# EAGLE board joint_1 (EAGLE 9.6.2), part 1 of 2
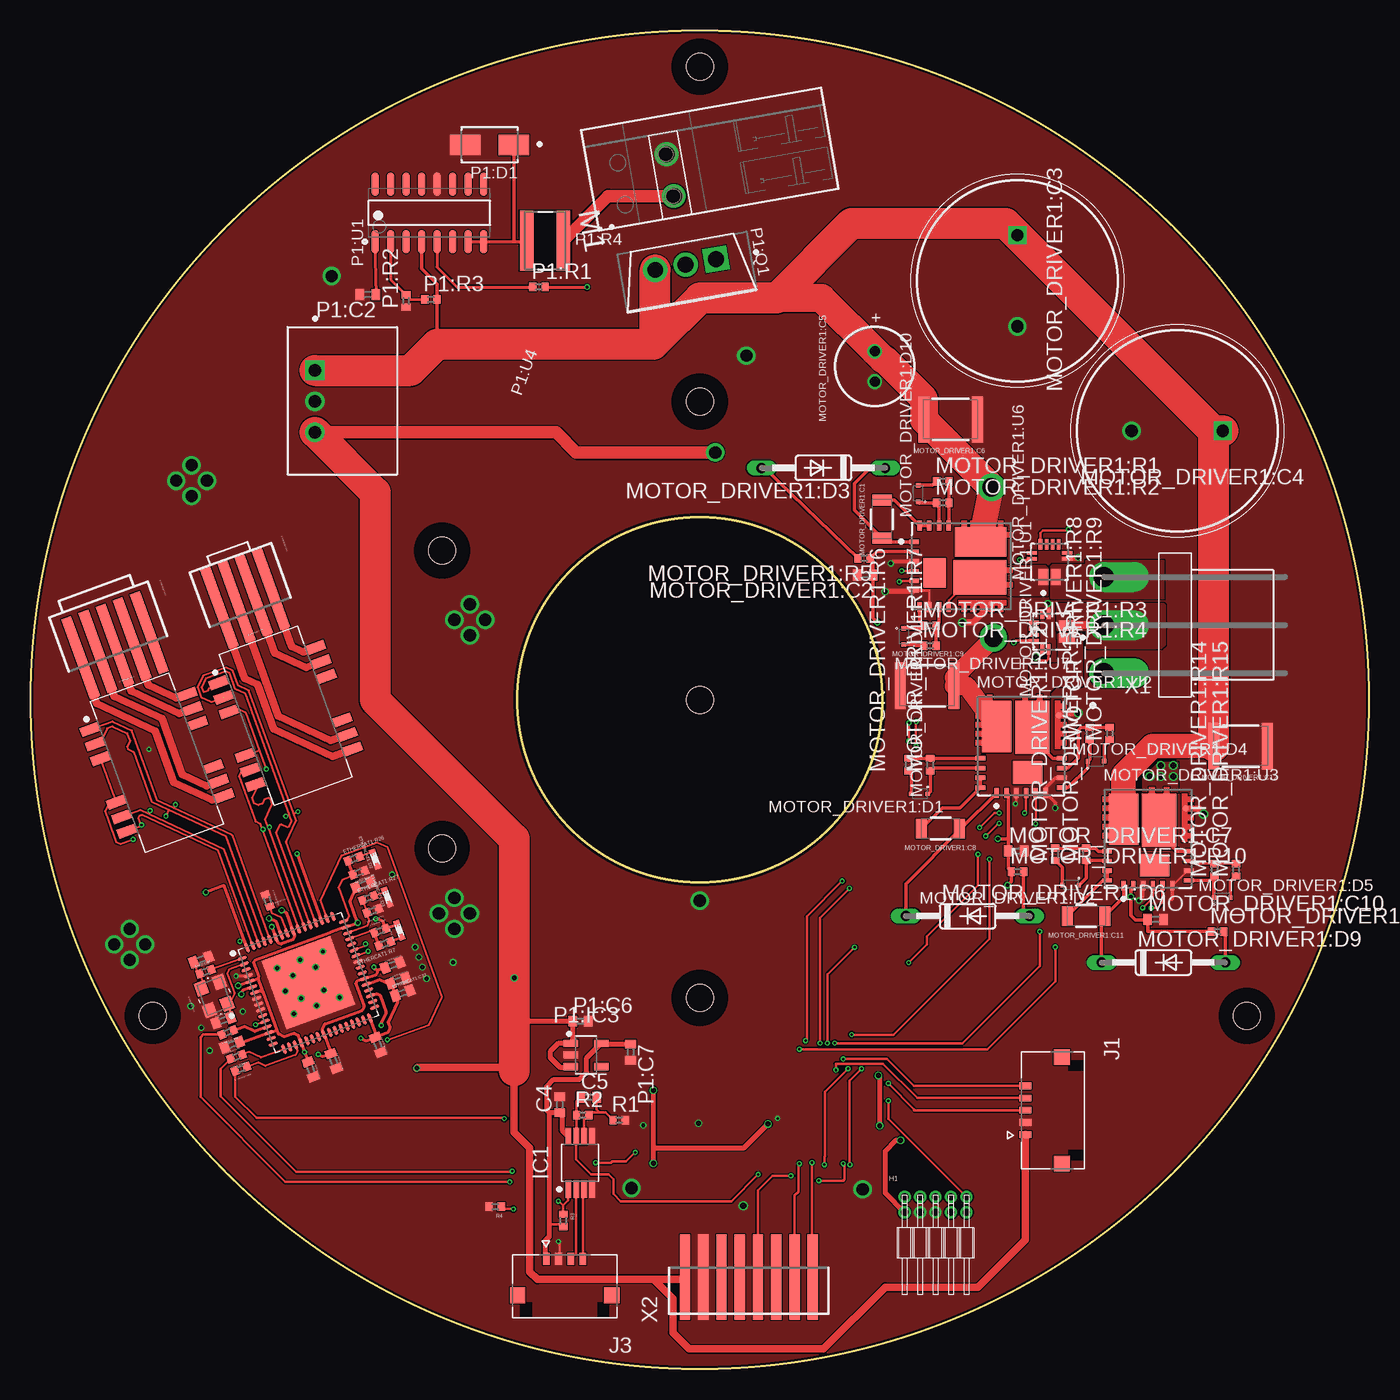
[diagram p0: board, top side]
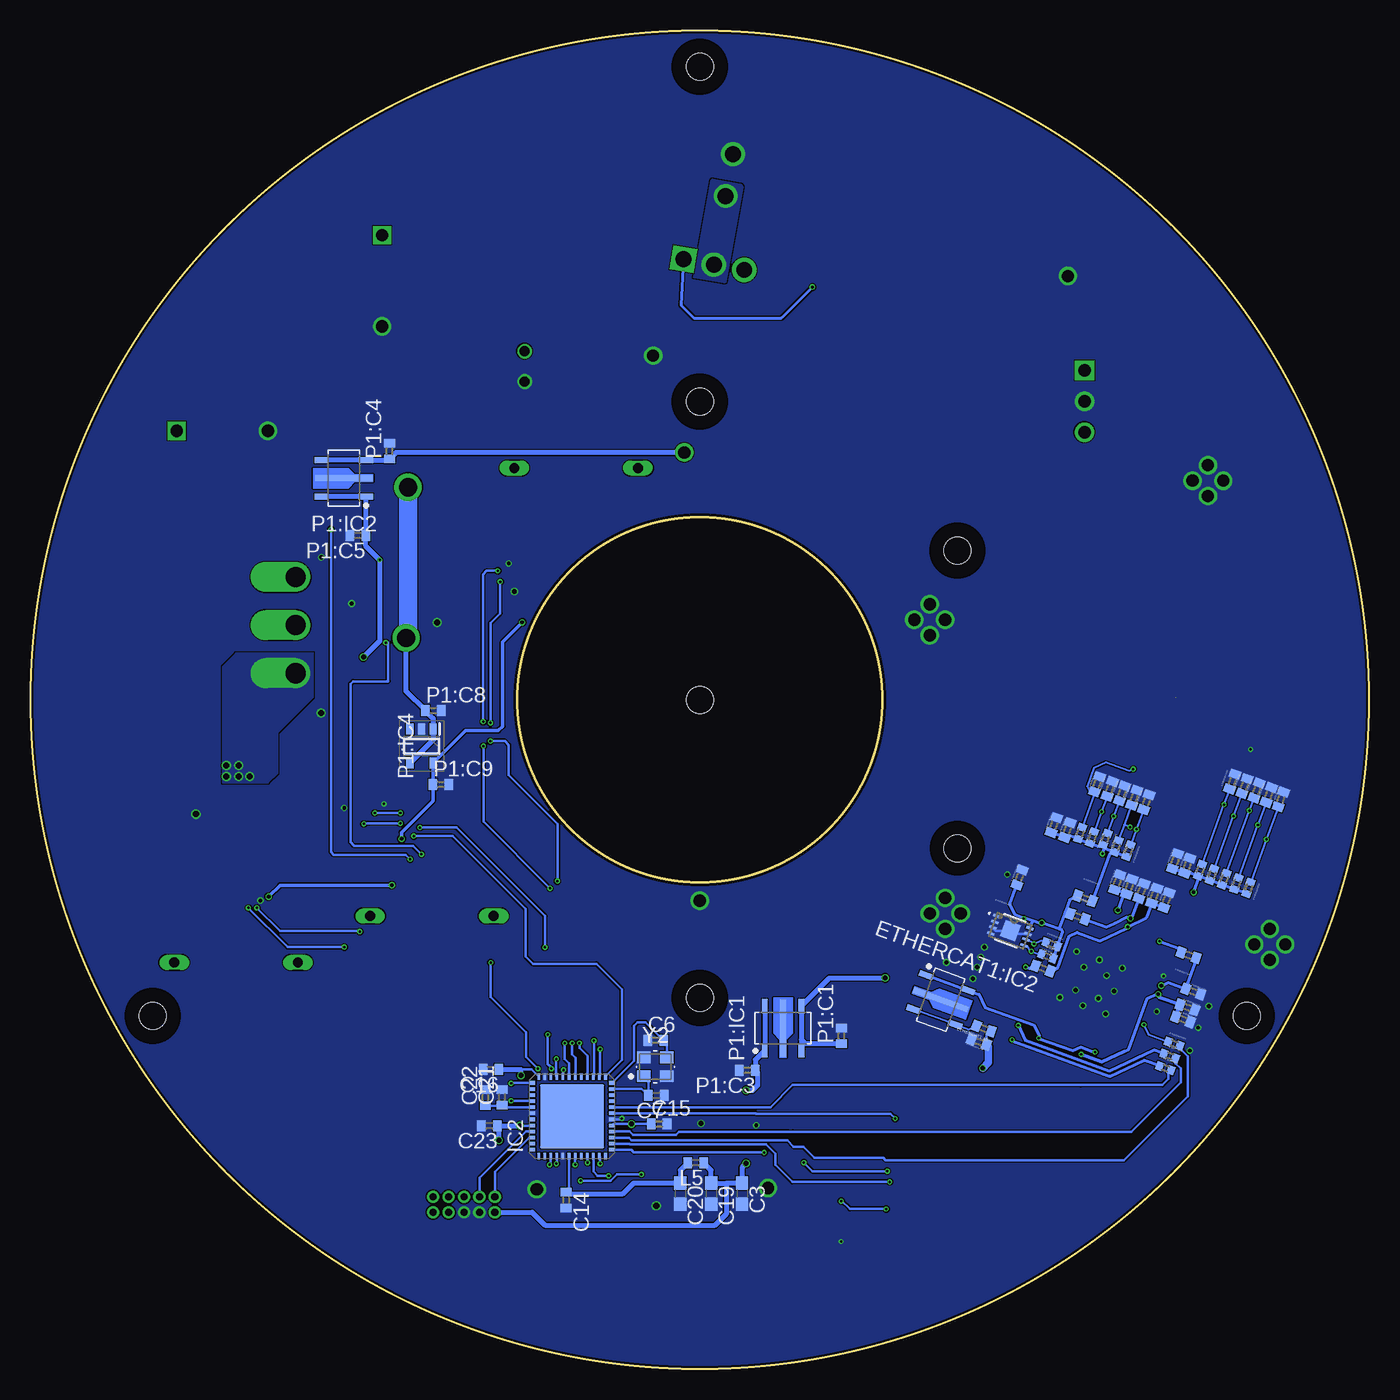
[diagram p1: board, bottom side, seen from below]

Size 110 x 110 mm. Coordinates in mm from the lower left corner, seen from the top.
Outline: circle at 55,55 radius 55
Outline: circle at 55,55 radius 15
Copper layers (1*16): Top 0.018mm / dielectric 1.55mm / Bottom 0.018mm
Design rules "Multi-CB_2L_100µm-Tracks_OL35µm": minimum track width 0.1mm, minimum drill 0.2mm, track to track 0.1mm, track to pad 0.1mm, pad to pad 0.1mm, via to via 0.1mm, smd to smd 0mil, copper to edge 0.2mm, drill to drill 0.2mm, minimum pad ring 0.125mm, minimum via ring 0.1mm, stop-mask expansion 2mil, vias tented up to drill 0.45mm, thermal gap 0.2mm
Net classes: 0 default: width 0.152 mm, drill 0.2 mm, clearance 0.076 mm; 1 power: width 0.229 mm, drill 0.2 mm, clearance 0.152 mm
Holes 2.2 mm at 55,55 55,107 99.96,29.02 10.04,29.02 55,79.5 33.82,67.26 33.84,42.8 55,30.5
tRestrict: area 7.8,26.8 to 12.2,31.2; area 97.8,26.8 to 102.2,31.2; area 31.6,40.6 to 36,45; area 31.6,65.1 to 36,69.5; area 52.8,28.3 to 57.2,32.7; area 52.8,77.3 to 57.2,81.7; area 52.8,104.8 to 57.2,109.2
bRestrict: area 7.8,26.8 to 12.2,31.2; area 97.8,26.8 to 102.2,31.2; area 31.6,40.6 to 36,45; area 31.6,65.1 to 36,69.5; area 52.8,28.3 to 57.2,32.7; area 52.8,77.3 to 57.2,81.7; area 52.8,104.8 to 57.2,109.2

## Footprints (pad centres in the part's own frame; a part is rotated, then mirrored left to right if it is on the bottom)
C0603 = smd 1.1 x 1: 1 -0.85,0; 2 0.85,0
C0402 = smd 0.7 x 0.9: 1 -0.65,0; 2 0.65,0
LED0402 = smd 0.6 x 0.5: 1 -0.55,0; 2 0.55,0
UDFN8 = smd 0.606 x 0.225: 1 -1.446,0.75; 2 -1.446,0.25; 3 -1.446,-0.25; 4 -1.446,-0.75; 5 1.446,-0.75; 6 1.446,-0.25; 7 1.446,0.25; 8 1.446,0.75 | smd 1.295 x 1.397: 9 0,0
SOT-89-5 = smd 1.17 x 0.491: 1 -1.814,1.5; 3 -1.814,-1.5; 4 1.814,-1.5; 5 1.814,1.5 | smd 4.75 x 0.491: 2 0,0
BEAD0402 = smd 0.7 x 0.9: 1 -0.65,0; 2 0.65,0
R0402 = smd 0.6 x 0.7: 1 -0.5,0; 2 0.5,0
SOIC127P965X533-16-TRAFO = smd 1.512 x 0.772: 1 -4.275,4.445; 2 -4.275,3.175; 3 -4.275,1.905; 6 -4.275,-1.905; 7 -4.275,-3.175; 8 -4.275,-4.445; 9 4.275,-4.445; 10 4.275,-3.175; 11 4.275,-1.905; 14 4.275,1.905; 15 4.275,3.175; 16 4.275,4.445
QFN64-T600 = smd 0.837 x 0.264: 1 -4.437,3.75; 2 -4.437,3.25; 3 -4.437,2.75; 4 -4.437,2.25; 5 -4.437,1.75; 6 -4.437,1.25; 7 -4.437,0.75; 8 -4.437,0.25; 9 -4.437,-0.25; 10 -4.437,-0.75; 11 -4.437,-1.25; 12 -4.437,-1.75; 13 -4.437,-2.25; 14 -4.437,-2.75; 15 -4.437,-3.25; 16 -4.437,-3.75; 33 4.437,-3.75; 34 4.437,-3.25; 35 4.437,-2.75; 36 4.437,-2.25; 37 4.437,-1.75; 38 4.437,-1.25; 39 4.437,-0.75; 40 4.437,-0.25; 41 4.437,0.25; 42 4.437,0.75; 43 4.437,1.25; 44 4.437,1.75; 45 4.437,2.25; 46 4.437,2.75; 47 4.437,3.25; 48 4.437,3.75 | smd 0.264 x 0.837: 17 -3.75,-4.437; 18 -3.25,-4.437; 19 -2.75,-4.437; 20 -2.25,-4.437; 21 -1.75,-4.437; 22 -1.25,-4.437; 23 -0.75,-4.437; 24 -0.25,-4.437; 25 0.25,-4.437; 26 0.75,-4.437; 27 1.25,-4.437; 28 1.75,-4.437; 29 2.25,-4.437; 30 2.75,-4.437; 31 3.25,-4.437; 32 3.75,-4.437; 49 3.75,4.437; 50 3.25,4.437; 51 2.75,4.437; 52 2.25,4.437; 53 1.75,4.437; 54 1.25,4.437; 55 0.75,4.437; 56 0.25,4.437; 57 -0.25,4.437; 58 -0.75,4.437; 59 -1.25,4.437; 60 -1.75,4.437; 61 -2.25,4.437; 62 -2.75,4.437; 63 -3.25,4.437; 64 -3.75,4.437 | smd 6 x 6: 65 0,0
87438-04 = smd 7 x 0.85: 1 0,2.25; 2 0,0.75; 3 0,-0.75; 4 0,-2.25
87438-05 = smd 7 x 0.85: 1 0,3; 2 0,1.5; 3 0,0; 4 0,-1.5; 5 0,-3
ECX-2236 = smd 1.112 x 0.962: 1 -0.95,-0.775; 2 0.95,-0.775; 3 0.95,0.775; 4 -0.95,0.775
20021112-00010 = drill 0.6 pad 1.016: 1 -2.54,-0.635; 2 -2.54,0.635; 3 -1.27,-0.635; 4 -1.27,0.635; 5 0,-0.635; 6 0,0.635; 7 1.27,-0.635; 8 1.27,0.635; 9 2.54,-0.635; 10 2.54,0.635
USOP8 = smd 1.425 x 0.467: 1 -2.164,0.975; 2 -2.164,0.325; 3 -2.164,-0.325; 4 -2.164,-0.975; 5 2.164,-0.975; 6 2.164,-0.325; 7 2.164,0.325; 8 2.164,0.975
QFN48 = smd 0.55 x 0.3: 1 -3.275,2.75; 2 -3.275,2.25; 3 -3.275,1.75; 4 -3.275,1.25; 5 -3.275,0.75; 6 -3.275,0.25; 7 -3.275,-0.25; 8 -3.275,-0.75; 9 -3.275,-1.25; 10 -3.275,-1.75; 11 -3.275,-2.25; 12 -3.275,-2.75; 25 3.275,-2.75; 26 3.275,-2.25; 27 3.275,-1.75; 28 3.275,-1.25; 29 3.275,-0.75; 30 3.275,-0.25; 31 3.275,0.25; 32 3.275,0.75; 33 3.275,1.25; 34 3.275,1.75; 35 3.275,2.25; 36 3.275,2.75 | smd 0.3 x 0.55: 13 -2.75,-3.275; 14 -2.25,-3.275; 15 -1.75,-3.275; 16 -1.25,-3.275; 17 -0.75,-3.275; 18 -0.25,-3.275; 19 0.25,-3.275; 20 0.75,-3.275; 21 1.25,-3.275; 22 1.75,-3.275; 23 2.25,-3.275; 24 2.75,-3.275; 37 2.75,3.275; 38 2.25,3.275; 39 1.75,3.275; 40 1.25,3.275; 41 0.75,3.275; 42 0.25,3.275; 43 -0.25,3.275; 44 -0.75,3.275; 45 -1.25,3.275; 46 -1.75,3.275; 47 -2.25,3.275; 48 -2.75,3.275 | smd 5.309 x 5.309: EXP 0,0
MOLEX_5037630591 = smd 0.55 x 1: 1 2,-2.265; 2 1,-2.265; 3 0,-2.265; 4 -1,-2.265; 5 -2,-2.265 | smd 1.26 x 1.3: S1 4.375,0.725; S2 -4.375,0.725
MOLEX_5037630491 = smd 0.55 x 1: 1 1.5,-2.265; 2 0.5,-2.265; 3 -0.5,-2.265; 4 -1.5,-2.265 | smd 1.26 x 1.3: S1 3.875,0.725; S2 -3.875,0.725
1945096 = drill 1.3: 1 -1.75,0; 2 1.75,0
WCAP-CSGP_1206_H1.6 = smd 0.9 x 1.6: 1 -1.55,0; 2 1.55,0
CAPPRD750W80D1650H2700 = drill 1 pad 1.5 square: 1 0,0 | drill 1 pad 1.5: 2 7.5,0
WCAP-ATG8_6.3X11(DXL) = drill 0.8: 1 1.25,0; 2 -1.25,0
WCAP-CSMH_1812_H2.0 = smd 0.9 x 3.8: 1 -2.2,0; 2 2.2,0
INFINEON_BAS3005A-02V_0 = smd 0.35 x 0.35: 1 -0.672,0; 2 0.678,0
DO35-10 = drill 0.813 long: A 5.08,0; C -5.08,0
INFINEON_IRSM005-800MH_0 = smd 0.36 x 0.8: 1 -2,-3.85; 2 -1.2,-3.85; 3 -0.4,-3.85; 4 0.4,-3.85; 5 1.2,-3.85; 6 2,-3.85 | smd 0.8 x 0.36: 7 3.35,-3.42; 8 3.35,-2.62; 9 3.35,-1.82; 10 3.35,-1.02; 24 -3.35,-1.02; 25 -3.35,-1.82; 26 -3.35,-2.62; 27 -3.35,-3.42 | smd 0.489 x 0.489: 11-12-13-14-15 3.076,2.516 | smd 2.794 x 4.318: 16-17 0.915,1.546 | smd 2.413 x 4.191: 18-19-20-21-22-23 -2.016,1.602 | smd 2.43 x 1.86: 28 0.53,-2.17
ALLEGRO_MICROSYSTEMS_LLC_ACS70331EESATR-005B3_0 = smd 1.3 x 0.8: 1-2 -1.25,0.5; 3-4 -1.25,-0.5 | smd 0.3 x 0.85: 5 0.25,-1.45; 6 0.75,-1.45; 11 0.75,1.45; 12 0.25,1.45 | smd 0.85 x 0.3: 7 1.45,-0.75; 8 1.45,-0.25; 9 1.45,0.25; 10 1.45,0.75
DIODES_SMAT70A-13-F_0 = smd 2.5 x 1.7: 1 -2,0; 2 2,0
SOT-23-5 = smd 1.209 x 0.589: 1 -1.253,0.95; 2 -1.253,0; 3 -1.253,-0.95; 4 1.253,-0.95; 5 1.253,0.95
SOT95P280X130-5N = smd 0.9 x 0.6: 1 -1.4,0.95; 2 -1.4,0; 3 -1.4,-0.95; 4 1.4,-0.95; 5 1.4,0.95
INFINEON_IRF640NPBF_0 = drill 1.3 pad 2 square: 1 -0.61,2.54 | drill 1.3 pad 2: 2 -0.61,0; 3 -0.61,-2.54
VISHAY_CRCW12181K00FKEK_0 = smd 1.1 x 4.9: 1 -1.5,0; 2 1.5,0
LINEAR_TECHNOLOGY_LT4356HS-3#PBF_0 = smd 1.9 x 0.6: 1 -2.35,4.445; 2 -2.35,3.175; 3 -2.35,1.905; 4 -2.35,0.635; 5 -2.35,-0.635; 6 -2.35,-1.905; 7 -2.35,-3.175; 8 -2.35,-4.445; 9 2.35,-4.445; 10 2.35,-3.175; 11 2.35,-1.905; 12 2.35,-0.635; 13 2.35,0.635; 14 2.35,1.905; 15 2.35,3.175; 16 2.35,4.445
RECOM_R-78E5.0-1.0_0 = drill 1.05 pad 1.6 square: 1 -2.49,-2.25 | drill 1.05 pad 1.6: 2 0.05,-2.25; 3 2.59,-2.25
B3PS-VH(LF)(SN) = drill 1.65 offset: 1 -3.96,0; 2 0,0; 3 3.96,0
87438-08 = smd 7 x 0.85: 1 0,5.25; 2 0,3.75; 3 0,2.25; 4 0,0.75; 5 0,-0.75; 6 0,-2.25; 7 0,-3.75; 8 0,-5.25

## Placement (x,y rotation side)
C3  10uF/10V  [C0603]  51.52,14.42 270 bottom
C4  100nF  [C0402]  43.5,21.72 90 top
C5  GCM1555C1H102FA16  [C0402]  45.87,22.34 0 top
C6  GCM1555C1H100JA16  [C0402]  58.62,27.02 0 bottom
C7  GCM1555C1H100JA16  [C0402]  58.58,22.48 180 bottom
C14  100nF  [C0402]  65.98,13.88 270 bottom
C15  100nF  [C0402]  58.34,20.14 0 bottom
C16  100nF  [C0402]  72.15,24.61 180 bottom
C19  10uF/10V  [C0603]  54.06,14.42 270 bottom
C20  10uF/10V  [C0603]  56.6,14.42 270 bottom
C21  GCM155R71C104JA55  [C0402]  71.25,22.33 90 bottom
C22  GRM155C80J475MEAAD  [C0402]  72.62,22.3 90 bottom
C23  100nF  [C0402]  72.28,20 180 bottom
ETHERCAT1:C1  1u  [C0402]  25.9,44.7 70 bottom
ETHERCAT1:C2  100n  [C0402]  24.79,44.29 70 bottom
ETHERCAT1:C3  1u  [C0402]  15.94,41.74 70 bottom
ETHERCAT1:C4  100n  [C0402]  14.94,41.37 70 bottom
ETHERCAT1:C5  100n  [C0402]  18.7,39.28 70 bottom
ETHERCAT1:C6  1u  [C0402]  20.7,40.01 70 bottom
ETHERCAT1:C7  100n  [C0402]  19.7,39.64 70 bottom
ETHERCAT1:C8  1u  [C0402]  17.64,38.9 70 bottom
ETHERCAT1:C9  100n  [C0402]  16.64,38.53 70 bottom
ETHERCAT1:C10  100n  [C0402]  14.46,31.02 340 bottom
ETHERCAT1:C11  100n  [C0402]  16.57,26.67 200 top
ETHERCAT1:C12  100n  [C0402]  23.03,24.63 290 top
ETHERCAT1:C13  100n  [C0402]  28.55,26.64 290 top
ETHERCAT1:C14  100n  [C0402]  30.23,31.9 20 top
ETHERCAT1:C15  100n  [C0402]  27.36,39.8 20 top
ETHERCAT1:C16  1u  [C0402]  14.93,29.73 340 bottom
ETHERCAT1:C17  470p  [C0402]  15.29,28.73 340 bottom
ETHERCAT1:C18  100n  [C0402]  24.91,25.31 290 top
ETHERCAT1:C19  100n  [C0402]  29.76,33.2 20 top
ETHERCAT1:C20  18p  [C0402]  14.03,33.66 200 top
ETHERCAT1:C21  18p  [C0402]  15.85,28.66 20 top
ETHERCAT1:C22  100n  [C0402]  28.72,40.4 70 bottom
ETHERCAT1:C23  GCM1555C1H100JA16  [C0402]  18.3,46.59 70 bottom
ETHERCAT1:C24  GCM1555C1H100JA16  [C0402]  19.3,46.95 70 bottom
ETHERCAT1:C25  GCM1555C1H100JA16  [C0402]  20.3,47.31 70 bottom
ETHERCAT1:C26  GCM1555C1H100JA16  [C0402]  21.3,47.68 70 bottom
ETHERCAT1:C27  GCM1555C1H100JA16  [C0402]  11.24,48.27 70 bottom
ETHERCAT1:C28  GCM1555C1H100JA16  [C0402]  10.24,47.91 70 bottom
ETHERCAT1:C29  GCM1555C1H100JA16  [C0402]  9.24,47.54 70 bottom
ETHERCAT1:C30  GCM1555C1H100JA16  [C0402]  8.24,47.18 70 bottom
ETHERCAT1:C31  22n  [C0402]  22.35,48.06 70 bottom
ETHERCAT1:C32  22n  [C0402]  7.24,46.82 70 bottom
ETHERCAT1:C33  GRM155C80J106ME11D  [C0402]  30.59,30.91 20 top
ETHERCAT1:C66  1uF  [C0402]  32.06,26.88 160 bottom
ETHERCAT1:D1  QBLP595-IG  [LED0402]  30.31,36.06 110 top
ETHERCAT1:D2  QBLP595-IG  [LED0402]  28.32,41.9 110 top
ETHERCAT1:D3  QBLP595-IG  [LED0402]  29.32,38.78 110 top
ETHERCAT1:IC1  CAT24C512IGT3HU5  [UDFN8]  29.48,36.02 340 bottom
ETHERCAT1:IC2  RP115H331B-T1-FE  [SOT-89-5]  35.2,30.35 340 bottom
ETHERCAT1:L1  BLM15EG221SH1D  [BEAD0402]  23.35,38.68 340 bottom
ETHERCAT1:L2  BLM15EG221SH1D  [BEAD0402]  14.83,34.01 160 bottom
ETHERCAT1:L3  BLM15EG221SH1D  [BEAD0402]  23.94,37.19 340 bottom
ETHERCAT1:L4  BLM15EG221SH1D  [BEAD0402]  26.8,32.92 340 bottom
ETHERCAT1:L5  BLM15EG221SH1D  [BEAD0402]  31.66,27.98 160 bottom
ETHERCAT1:R1  0R  [R0402]  14.39,32.66 20 top
ETHERCAT1:R2  12k1  [R0402]  19.5,38.51 290 top
ETHERCAT1:R4  4k7  [R0402]  26.07,34.92 340 bottom
ETHERCAT1:R5  4k7  [R0402]  26.44,33.92 340 bottom
ETHERCAT1:R6  10k  [R0402]  28.73,36.02 20 top
ETHERCAT1:R7  RL0402FR-7W10KL  [R0402]  29.12,34.96 200 top
ETHERCAT1:R8  49R9  [R0402]  22.75,43.68 250 bottom
ETHERCAT1:R9  49R9  [R0402]  21.67,43.55 250 bottom
ETHERCAT1:R10  49R9  [R0402]  20.75,42.96 250 bottom
ETHERCAT1:R11  49R9  [R0402]  19.76,42.59 250 bottom
ETHERCAT1:R12  49R9  [R0402]  10.89,39.9 250 bottom
ETHERCAT1:R13  49R9  [R0402]  11.89,40.26 250 bottom
ETHERCAT1:R14  49R9  [R0402]  12.89,40.62 250 bottom
ETHERCAT1:R15  49R9  [R0402]  13.89,40.99 250 bottom
ETHERCAT1:R16  0R  [R0402]  23.75,44.04 250 bottom
ETHERCAT1:R17  0R  [R0402]  9.89,39.53 250 bottom
ETHERCAT1:R18  100  [R0402]  17.3,24.67 200 top
ETHERCAT1:R19  100  [R0402]  16.74,24.73 340 bottom
ETHERCAT1:R20  100  [R0402]  16.38,25.73 340 bottom
ETHERCAT1:R21  100  [R0402]  16.02,26.73 340 bottom
ETHERCAT1:R22  100  [R0402]  16.21,27.67 200 top
ETHERCAT1:R23  100  [R0402]  16.94,25.67 200 top
ETHERCAT1:R24  10k  [R0402]  26.99,40.8 200 top
ETHERCAT1:R25  10k  [R0402]  28.13,37.66 200 top
ETHERCAT1:R26  RL0402FR-7W10KL  [R0402]  26.58,41.94 20 top
ETHERCAT1:R27  RL0402FR-7W10KL  [R0402]  27.75,38.72 20 top
ETHERCAT1:T1  749020100  [SOIC127P965X533-16-TRAFO]  20.97,53.68 20 top
ETHERCAT1:T2  749020100  [SOIC127P965X533-16-TRAFO]  10.4,49.83 20 top
ETHERCAT1:U1  LAN9252/ML  [QFN64-T600]  22.84,31.74 20 top
ETHERCAT1:X1  87438-0443  [87438-04]  17.63,63.37 290 top
ETHERCAT1:X3  87438-0543  [87438-05]  6.94,59.48 290 top
ETHERCAT1:Y1  [ECX-2236]  15.12,30.66 110 top
H1  20021112-00010T4LF  [20021112-00010]  74.37,13.52 0 top
IC1  MAX4208AUA+T  [USOP8]  45.17,16.96 90 top
IC2  ATSAMD51G18A-MUT  [QFN48]  65.49,20.77 90 bottom
J1  5037630591  [MOLEX_5037630591]  84.02,21.27 270 top
J3  5037630491  [MOLEX_5037630491]  43.9,6.8 180 top
L5  BLM15EG221SH1D  [BEAD0402]  55.33,16.96 180 bottom
M1  PST1,3/2-3,5  [1945096]  52.57,98.11 100 top
MOTOR_DRIVER1:C1  10 µF  [WCAP-CSGP_1206_H1.6]  69.97,69.85 90 top
MOTOR_DRIVER1:C2  10u 25V  [C0402]  68.59,65.25 180 top
MOTOR_DRIVER1:C3  MAL219091105E3  [CAPPRD750W80D1650H2700]  81.1,93.18 270 top
MOTOR_DRIVER1:C4  MAL219091105E3  [CAPPRD750W80D1650H2700]  97.99,77.1 180 top
MOTOR_DRIVER1:C5  220 µF  [WCAP-ATG8_6.3X11(DXL)]  69.39,82.39 90 top
MOTOR_DRIVER1:C6  470000pF  [WCAP-CSMH_1812_H2.0]  75.61,78.03 180 top
MOTOR_DRIVER1:C7  10u 25V  [C0402]  81.01,42.57 0 top
MOTOR_DRIVER1:C8  10 µF  [WCAP-CSGP_1206_H1.6]  74.78,44.41 180 top
MOTOR_DRIVER1:C9  470000pF  [WCAP-CSMH_1812_H2.0]  73.67,56.14 0 top
MOTOR_DRIVER1:C10  10u 25V  [C0402]  92.47,36.97 0 top
MOTOR_DRIVER1:C11  10 µF  [WCAP-CSGP_1206_H1.6]  86.75,37.22 180 top
MOTOR_DRIVER1:C12  470000pF  [WCAP-CSMH_1812_H2.0]  99.45,51.19 180 top
MOTOR_DRIVER1:D1  INFINEON_BAS3005A-02VINFINEON_BAS3005A-02V_0_0  [INFINEON_BAS3005A-02V_0]  73.06,47.26 180 top
MOTOR_DRIVER1:D2  INFINEON_BAS3005A-02VINFINEON_BAS3005A-02V_0_0  [INFINEON_BAS3005A-02V_0]  85.48,39.76 180 top
MOTOR_DRIVER1:D3  BAV21  [DO35-10]  65.16,74.05 180 top
MOTOR_DRIVER1:D4  INFINEON_BAS3005A-02VINFINEON_BAS3005A-02V_0_0  [INFINEON_BAS3005A-02V_0]  87.56,49.94 0 top
MOTOR_DRIVER1:D5  INFINEON_BAS3005A-02VINFINEON_BAS3005A-02V_0_0  [INFINEON_BAS3005A-02V_0]  97.93,38.74 0 top
MOTOR_DRIVER1:D6  BAV21  [DO35-10]  77.01,37.23 0 top
MOTOR_DRIVER1:D9  BAV21  [DO35-10]  93.1,33.41 0 top
MOTOR_DRIVER1:D10  INFINEON_BAS3005A-02VINFINEON_BAS3005A-02V_0_0  [INFINEON_BAS3005A-02V_0]  72.94,71.94 90 top
MOTOR_DRIVER1:D11  INFINEON_BAS3005A-02VINFINEON_BAS3005A-02V_0_0  [INFINEON_BAS3005A-02V_0]  71.76,60.21 270 top
MOTOR_DRIVER1:R1  27  [R0402]  74.97,72.96 0 top
MOTOR_DRIVER1:R2  100  [R0402]  74.97,71.18 0 top
MOTOR_DRIVER1:R3  100  [R0402]  73.92,61.1 0 top
MOTOR_DRIVER1:R4  27  [R0402]  73.92,59.45 0 top
MOTOR_DRIVER1:R5  5.1  [R0402]  68.5,66.63 180 top
MOTOR_DRIVER1:R6  27  [R0402]  72.17,49.67 90 top
MOTOR_DRIVER1:R7  100  [R0402]  73.95,49.67 90 top
MOTOR_DRIVER1:R8  100  [R0402]  87.04,52.23 90 top
MOTOR_DRIVER1:R9  27  [R0402]  88.7,52.23 90 top
MOTOR_DRIVER1:R10  5.1  [R0402]  81.11,40.87 0 top
MOTOR_DRIVER1:R12  27  [R0402]  84.21,42.3 90 top
MOTOR_DRIVER1:R13  100  [R0402]  86.75,42.3 90 top
MOTOR_DRIVER1:R14  100  [R0402]  97.29,41.03 90 top
MOTOR_DRIVER1:R15  27  [R0402]  99.07,41.03 90 top
MOTOR_DRIVER1:R16  5.1  [R0402]  97.55,35.95 0 top
MOTOR_DRIVER1:U1  IRSM005-800MHINFINEON_IRSM005-800MH_0_0  [INFINEON_IRSM005-800MH_0]  76.48,65.97 270 top
MOTOR_DRIVER1:U2  IRSM005-800MHINFINEON_IRSM005-800MH_0_0  [INFINEON_IRSM005-800MH_0]  81.41,51.2 0 top
MOTOR_DRIVER1:U3  IRSM005-800MHINFINEON_IRSM005-800MH_0_0  [INFINEON_IRSM005-800MH_0]  91.83,43.57 0 top
MOTOR_DRIVER1:U6  ALLEGRO_MICROSYSTEMS_LLC_ACS70331EESATR-005B3ALLEGRO_MICROSYSTEMS_LLC_ACS70331EESATR-005B3_0_0  [ALLEGRO_MICROSYSTEMS_LLC_ACS70331EESATR-005B3_0]  83.74,66.33 90 top
MOTOR_DRIVER1:U7  ALLEGRO_MICROSYSTEMS_LLC_ACS70331EESATR-005B3ALLEGRO_MICROSYSTEMS_LLC_ACS70331EESATR-005B3_0_0  [ALLEGRO_MICROSYSTEMS_LLC_ACS70331EESATR-005B3_0]  83.91,60.6 180 top
P1:C1  GCM155C71A105KE38D  [C0402]  43.36,27.38 90 bottom
P1:C2  GCM155R71C104JA55  [C0402]  27.74,88.3 180 top
P1:C3  GCM155C71A105KE38D  [C0402]  51.09,24.55 180 bottom
P1:C4  GCM155C71A105KE38D  [C0402]  80.5,75.43 90 bottom
P1:C5  GCM155C71A105KE38D  [C0402]  83.1,68.5 180 bottom
P1:C6  GCM155C71A105KE38D  [C0402]  45.2,28.59 0 top
P1:C7  GRM155C80J225KE95D  [C0402]  49.33,26.04 270 top
P1:C8  GCM155C71A105KE38D  [C0402]  76.89,54.1 0 bottom
P1:C9  GCM155C71A105KE38D  [C0402]  76.27,48.04 0 bottom
P1:D1  DIODES_SMAT70A-13-FDIODES_SMAT70A-13-F_0_0  [DIODES_SMAT70A-13-F_0]  37.73,100.59 180 top
P1:IC1  RP115H331B-T1-FE  [SOT-89-5]  48.16,28.01 90 bottom
P1:IC2  RP115H331B-T1-FE  [SOT-89-5]  84.25,73.21 180 bottom
P1:IC3  AP2204K-5.0TRG1  [SOT-23-5]  45.65,25.81 0 top
P1:IC4  XC6701AF02MR-G  [SOT95P280X130-5N]  77.86,51.19 270 bottom
P1:Q1  INFINEON_IRF640NPBFINFINEON_IRF640NPBF_0_0  [INFINEON_IRF640NPBF_0]  53.95,90.16 280 top
P1:R1  10  [R0402]  41.79,88.91 0 top
P1:R2  4.99k  [R0402]  30.87,87.77 90 top
P1:R3  118k  [R0402]  32.9,87.89 0 top
P1:R4  VISHAY_CRCW12181K00FKEKVISHAY_CRCW12181K00FKEK_0_0  [VISHAY_CRCW12181K00FKEK_0]  42.3,92.72 0 top
P1:U1  LINEAR_TECHNOLOGY_LT4356HS-3#PBFLINEAR_TECHNOLOGY_LT4356HS-3#PBF_0_0  [LINEAR_TECHNOLOGY_LT4356HS-3#PBF_0]  32.77,95 90 top
P1:U4  RECOM_R-78E5.0-1.0RECOM_R-78E5.0-1.0_0_0  [RECOM_R-78E5.0-1.0_0]  25.63,79.57 270 top
R1  Rg  [R0402]  48.38,20.47 0 top
R2  Rg2  [R0402]  45.37,20.87 0 top
R3  RT0402FRE07100KL  [R0402]  43.78,12.21 270 top
R4  RT0402FRE07100KL  [R0402]  38.19,13.35 180 top
U$1  PTDA1,5/2-PH-3,5  [1725107]  48.57,97.41 100 top
X1  B3PS-VH(LF)(SN)  [B3PS-VH(LF)(SN)]  88.21,61.14 90 top
X2  87438-0843  [87438-08]  59.04,7.56 90 top
Y2  [ECX-2236]  58.65,24.84 0 bottom

## Library data of the parts
C3 C4 C14-C16 C19 C20 C23 MOTOR_DRIVER1:C2 MOTOR_DRIVER1:C7 MOTOR_DRIVER1:C10 = rcl; SPICEPREFIX: C
C5 = msrm; CAPACITANCE: 1000pF; DIGIKEY: 490-16461-1-ND; TOLERANCE: ±1%; VOLTAGE: 50V
C6 C7 ETHERCAT1:C23-ETHERCAT1:C30 = msrm; CAPACITANCE: 10pF; DIGIKEY: 490-10668-1-ND; TOLERANCE: ±5%; VOLTAGE: 50V
C21 ETHERCAT1:C2 ETHERCAT1:C4 ETHERCAT1:C5 ETHERCAT1:C7 ETHERCAT1:C9-ETHERCAT1:C15 ETHERCAT1:C18 ETHERCAT1:C19 ETHERCAT1:C22 P1:C2 = msrm; CAPACITANCE: 100nF; DIGIKEY: 490-16433-1-ND; TOLERANCE: ±5%; VOLTAGE: 16V
C22 = msrm; CAPACITANCE: 4.7uF; DIGIKEY: 490-14458-1-ND; TOLERANCE: ±20%; VOLTAGE: 6.3V
ETHERCAT1:C1 ETHERCAT1:C3 ETHERCAT1:C6 ETHERCAT1:C8 ETHERCAT1:C16 ETHERCAT1:C66 P1:C1 P1:C3-P1:C6 P1:C8 P1:C9 = msrm; CAPACITANCE: 1uF; DIGIKEY: 490-13409-1-ND; TOLERANCE: ±10%; VOLTAGE: 10V
ETHERCAT1:C17 = msrm; CAPACITANCE: 470pF; DIGIKEY: 490-4913-1-ND; TOLERANCE: ±10%; VOLTAGE: 50V
ETHERCAT1:C20 ETHERCAT1:C21 = msrm; CAPACITANCE: 18pF; DIGIKEY: 490-12650-1-ND; TOLERANCE: ±5%; VOLTAGE: 50V
ETHERCAT1:C31 ETHERCAT1:C32 = msrm; CAPACITANCE: 22nF; DIGIKEY: 490-6044-1-ND; TOLERANCE: ±10%; VOLTAGE: 25V
ETHERCAT1:C33 = msrm; CAPACITANCE: 10uF; DIGIKEY: 490-13233-1-ND; TOLERANCE: ±20%; VOLTAGE: 6.3V
ETHERCAT1:D1-ETHERCAT1:D3 = msrm; DIGIKEY: 1516-1216-1-ND
ETHERCAT1:IC1 = msrm; DIGIKEY: CAT24C512HU5IGT3OSCT-ND; LEAD_FINISH: NiPdAu; TEMPERATURE: -40°C ~ 85°C
ETHERCAT1:IC2 = msrm; VOLTAGE: 3.3V
ETHERCAT1:L1-ETHERCAT1:L5 L5 = msrm; DC_RES: 280mOhm; DIGIKEY: 490-17345-1-ND; IMPEDANCE-FREQUENCY: 220 Ohms @ 100MHz
ETHERCAT1:R1 ETHERCAT1:R16 ETHERCAT1:R17 = msrm; DIGIKEY: 311-0.0LRCT-ND; NOTES: Actual Part Number: RC0402FR-070RL; RVALUE: 0R; SPICEPREFIX: R
ETHERCAT1:R2 = msrm; DIGIKEY: RT0402FRE0712K1L-ND; RVALUE: 12k1; SPICEPREFIX: R
ETHERCAT1:R4 ETHERCAT1:R5 = msrm; DIGIKEY: YAG3347CT-ND; RVALUE: 4k7; SPICEPREFIX: R
ETHERCAT1:R6 ETHERCAT1:R24 ETHERCAT1:R25 = msrm; DIGIKEY: YAG1233CT-ND; RVALUE: 10k; SPICEPREFIX: R
ETHERCAT1:R7 ETHERCAT1:R26 ETHERCAT1:R27 = msrm; RVALUE: 10k; SPICEPREFIX: R
ETHERCAT1:R8-ETHERCAT1:R15 = msrm; DIGIKEY: YAG3346CT-ND; RVALUE: 49R9; SPICEPREFIX: R
ETHERCAT1:R18-ETHERCAT1:R23 = msrm; DIGIKEY: YAG3342CT-ND; RVALUE: 100; SPICEPREFIX: R
ETHERCAT1:T1 ETHERCAT1:T2 = msrm; DIGIKEY: 732-3268-1-ND
ETHERCAT1:U1 = msrm; DIGIKEY: LAN9252/ML-ND; TAPE_AND_REEL: Tray; TEMP: 0°C to 70°C
ETHERCAT1:X1 = msrm; DIGIKEY: WM7648CT-ND; MF: MOLEX
ETHERCAT1:X3 = msrm; COLOR: beige; DIGIKEY: WM7649CT-ND
ETHERCAT1:Y1 = msrm; DIGIKEY: XC3051CT-ND; F: 25MHz; F_TOLERANCE: ±10ppm; L_CAPACITANCE: 18pF
H1 = msrm; DIGIKEY: 609-5926-ND; PINS: 10
IC1 = msrm; DESCRIPTION: Instrument Amp Single R-R O/P 2.75/5.5V; DIGIKEY: MAX4208AUA+-ND; HEIGHT: 1.1mm; INPUT_RESISTANCE: 2G; MANUFACTURER_NAME: Maxim Integrated; MANUFACTURER_PART_NUMBER: MAX4208AUA+; MOUSER_PART_NUMBER: 700-MAX4208AUA; MOUSER_PRICE-STOCK: https://www.mouser.com/Search/Refine.aspx?Keyword=700-MAX4208AUA; RS_PART_NUMBER: 7328406P; RS_PRICE-STOCK: http://uk.rs-online.com/web/p/products/7328406P; SPICEPREFIX: X; SUPPLY_CURRENT: Buffer OFF: 0.75 - 1.3 mA Buffer ON: 1.4 - 2.3 mA; SUPPLY_VOLTAGE: Single: 2.85 - 5.5 Dual: ±1.425 - ±2.75; VOLTAGE_GAIN: 1 - (1 + R2/R1)
IC2 = msrm; DIGIKEY: ATSAMD51G18A-MUTCT-ND; FLASH: 256KB; SRAM: 128KB
J1 = 5037630591; AVAILABILITY: In Stock; DESCRIPTION: Connector Header Surface Mount, Right Angle 5 position 0.039 (1.00mm); MF: Molex; MP: 503763-0591; PACKAGE: None; PRICE: None; PURCHASE-URL: https://pricing.snapeda.com/search/part/503763-0591/?ref=eda
J3 = 5037630491; AVAILABILITY: In Stock; DESCRIPTION: Connector Header Surface Mount, Right Angle 4 position 0.039 (1.00mm); MF: Molex; MP: 5037630491; PACKAGE: None; PRICE: None; PURCHASE-URL: https://pricing.snapeda.com/search/part/5037630491/?ref=eda
M1 = msrm; DIGIKEY: 277-1749-ND; PITCH: 3,5
MOTOR_DRIVER1:C1 MOTOR_DRIVER1:C8 MOTOR_DRIVER1:C11 = Wurth_Capacitors_WCAP-CSGP; CERAMIC-TYPE: X7R Class II; DATASHEET-URL: https://www.we-online.com/catalog/datasheet/885012208069.pdf; DF: 0.1; H: 1.6mm; OPERATING-TEMPERATURE: -55 °C up to +125 °C; PART-NUMBER: 885012208069; QMIN: -; RISO: 0.01GOhm; TECHNICAL-REFERENCE: X7R1206106K025DFCT10000; TOL-VALUE: ±10%; VR: 25V(DC)
MOTOR_DRIVER1:C3 MOTOR_DRIVER1:C4 = MAL219091105E3; DESCRIPTION: Aluminum Electrolytic Capacitors - Radial Leaded 1000uF 50V 16 x 25; HEIGHT: 27mm; MANUFACTURER_NAME: Vishay; MANUFACTURER_PART_NUMBER: MAL219091105E3; MOUSER_PART_NUMBER: 594-MAL219091105E3; MOUSER_PRICE-STOCK: https://www.mouser.co.uk/ProductDetail/Vishay-BC-Components/MAL219091105E3?qs=W%2FMpXkg%252BdQ4f95s%252BY5cfkQ%3D%3D
MOTOR_DRIVER1:C5 = Wurth_Capacitors_WCAP-ATG8; DATASHEET-URL: https://www.we-online.com/catalog/datasheet/860010473011.pdf; DF: 14%; DIAMETER: 6.3mm; I-LEAK: 55uA; I-RIPPLE: 310mA; L: 11mm; OPERATING-TEMPERATURE: -40 °C up to +85 °C; PART-NUMBER: 860010473011; PITCH: 2.5mm; TECHNICAL-REFERENCE: ATBD110221M025DSPA4B000; VR: 25V(DC)
MOTOR_DRIVER1:C6 MOTOR_DRIVER1:C9 MOTOR_DRIVER1:C12 = Wurth_Capacitors_WCAP-CSMH; CERAMIC-TYPE: X7R Class II; DATASHEET-URL: https://www.we-online.com/catalog/datasheet/885342211003.pdf; DF: 2.5%; H: 2mm; OPERATING-TEMPERATURE: -55 / +125°C; PART-NUMBER: 885342211003; QMIN: -; RISO: 0.213GOhm; TECHNICAL-REFERENCE: X7R1812474K250DFCT10000; TOL-C: +/- 10%; VR: 250V(DC)
MOTOR_DRIVER1:D1 MOTOR_DRIVER1:D2 MOTOR_DRIVER1:D4 MOTOR_DRIVER1:D5 MOTOR_DRIVER1:D10 MOTOR_DRIVER1:D11 = Infineon - BAS3005A-02V; CIIVA_IDS: 21182063; COMPONENT_LINK_1_DESCRIPTION: Manufacturer URL; COMPONENT_LINK_1_URL: http://www.infineon.com/; COMPONENT_LINK_3_DESCRIPTION: Package Specification; COMPONENT_LINK_3_URL: http://www.infineon.com/dgdl/SC79-Package_Overview.pdf?folderId=db3a30431936bc4b011951fbddb03b15&fileId=db3a30431936bc4b01195226fe583b41; CONFIGURATION: single; CT_MAX: 15Â pF; DATASHEET: http://www.infineon.com/dgdl/bas3005aseries.pdf?folderId=db3a30431f848401011fcbf2ab4c04c4&fileId=db3a30432d9b3066012db872f12d0bb7; FOOTPRINT_VARIANT_NAME_0: Manufacturer Recommended; GREEN: true; HALOGEN_FREE: true; IF_MAX: 500Â mA; IMPORTED: yes; IMPORTED_FROM: vault; IMPORT_TS: 1521842213; MF: Infineon; MOUNTING_TECHNOLOGY: Surface Mount; MPN: BAS3005A-02V; PACKAGE: SC79; PACKAGE_DESCRIPTION: 2-Pin Semiconductor Package, 0.8 x 1.2 mm Body; PACKING: Reel; PREFIX: D; RELEASE_DATE: 1409237543; VAULT_GUID: EDAD54E0-67A3-4491-B804-28965AC47742; VAULT_REVISION: E1FDBEC9-D20E-4450-8851-E2B6A9887AF8; VF_MAX: 500Â V; VR_MAX: 30Â V
MOTOR_DRIVER1:D3 MOTOR_DRIVER1:D6 MOTOR_DRIVER1:D9 = diode
MOTOR_DRIVER1:R1-MOTOR_DRIVER1:R10 MOTOR_DRIVER1:R12-MOTOR_DRIVER1:R16 P1:R1-P1:R3 R1 R2 = rcl; SPICEPREFIX: R
MOTOR_DRIVER1:U1-MOTOR_DRIVER1:U3 = IRSM005-800MH; AUTOMOTIVE: No; CENTROID_NOT_SPECIFIED: No; DATASHEET: https://www.infineon.com/dgdl/Infineon-IRSM005-800MH-DS-v01_00-EN.pdf?fileId=5546d462533600a40153567bc6b52862; DEVICE_CLASS_L1: Integrated Circuits (ICs); DEVICE_CLASS_L2: Power Management ICs; DEVICE_CLASS_L3: Gate Drivers; DIGIKEY_DESCRIPTION: IC GATE DRIVER 40V QFN; DIGIKEY_PART_NUMBER: IRSM005-800MH-ND; FALL_TIME: 26ns; FOOTPRINT_URL: https://www.infineon.com/dgdl/Infineon-CIPOS_Nano_QFN-based_IPM-AN-v02_00-EN.pdf?fileId=5546d462533600a40153559abbe91132; FOOTPRINT_VARIANT_NAME_0: Recommended_Land_Pattern; HEIGHT: 1mm; LEAD_FREE: Yes; MAX_JUNCTION_TEMP: +150°C; MAX_POWER_DISSIPATION: 13W; MAX_SUPPLY_VOLTAGE: 20V; MF: Infineon; MFG_PACKAGE_IDENT: PG-IQFN-27; MFG_PACKAGE_IDENT_DATE: 0; MFG_PACKAGE_IDENT_REV: 901; MIN_SUPPLY_VOLTAGE: 10V; MOUSER_DESCRIPTION: Ipm Module, Mosfet, 80A, 40V, Pqfn Rohs Compliant: Yes; MOUSER_PART_NUMBER: 942-IRSM005-800MH; MPN: IRSM005-800MH; NOMINAL_SUPPLY_CURRENT: 45-250uA; NUMBER_OF_DRIVERS: 1; NUMBER_OF_OUTPUTS: 1; PACKAGE: QFN 7x8; PREFIX: U; RISE_TIME: 37ns; ROHS: Yes; STANDOFF_HEIGHT: 0mm; TEMPERATURE_RANGE_HIGH: +150°C; TURN_OFF_DELAY_TIME: 33ns; TURN_ON_DELAY_TIME: 11ns; VERIFICATION_VERSION: 0.0.0.3
MOTOR_DRIVER1:U6 MOTOR_DRIVER1:U7 = Allegro MicroSystems LLC - ACS70331EESATR-005B3; ACCURACY: 2%; AMBIENT_TEMPERATURE_RANGE_HIGH: +85°C; AMBIENT_TEMPERATURE_RANGE_LOW: -40°C; AUTOMOTIVE: No; CENTROID_NOT_SPECIFIED: No; CURRENT_SENSITIVITY: 200mV/A; DATASHEET: https://www.allegromicro.com/-/media/files/datasheets/acs70331-datasheet.ashx; DEVICE_CLASS_L1: Sensors; DEVICE_CLASS_L2: Current Sensors; DEVICE_CLASS_L3: unset; DIGIKEY_DESCRIPTION: HIGH SENSITIVITY, 1 MHZ, GMR-BAS; DIGIKEY_PART_NUMBER: 620-1887-1-ND; FOOTPRINT_VARIANT_NAME_0: Recommended_Land_Pattern; HEIGHT: 0.8mm; LEAD_FREE: Yes; MAX_JUNCTION_TEMP: +100°C; MAX_SENSING_CURRENT: 5A; MAX_SUPPLY_VOLTAGE: 4.5V; MF: Allegro MicroSystems LLC; MFG_PACKAGE_IDENT: ES-12; MFG_PACKAGE_IDENT_COMPONENT_ID: 18bcbf5156f7d6ef; MFG_PACKAGE_IDENT_DATE: 0; MFG_PACKAGE_IDENT_REV: 0; MIN_SUPPLY_VOLTAGE: 3V; MPN: ACS70331EESATR-005B3; OPERATING_SUPPLY_CURRENT: 4.5mA; PACKAGE: QFN12; PREFIX: U; ROHS: Yes; SENSING_METHOD: Hall Effect; SENSOR_OUTPUT: Analog Voltage; STANDOFF_HEIGHT: 0mm; TEMPERATURE_RANGE_HIGH: +85°C; TEMPERATURE_RANGE_LOW: -40°C; VERIFICATION_VERSION: 0.0.0.3
P1:C7 = msrm; CAPACITANCE: 2.2uF; DIGIKEY: 490-10012-1-ND; TOLERANCE: ±10%; VOLTAGE: 6.3V
P1:D1 = Diodes - SMAT70A-13-F; BREAKDOWN_VOLTAGE: 77.8V; CAPACITANCE: 140pF; CENTROID_NOT_SPECIFIED: No; CLAMPING_VOLTAGE: 100V; DATASHEET: https://www.diodes.com/assets/Datasheets/ds30213.pdf; DEVICE_CLASS_L1: Circuit Protection; DEVICE_CLASS_L2: TVS Diodes; DEVICE_CLASS_L3: unset; DIGIKEY_DESCRIPTION: DIODE TVS DIODE 70V 100V SMA; DIGIKEY_PART_NUMBER: SMAT70A-FDICT-ND; DIRECTION: Unidirectional; FOOTPRINT_URL: https://www.diodes.com/assets/Package-Files/SMA.pdf; HEIGHT: 2.4mm; LEAD_FREE: yes; MAX_JUNCTION_TEMP: +150°C; MF: Diodes; MFG_PACKAGE_IDENT: SMA; MFG_PACKAGE_IDENT_DATE: 03/2017; MFG_PACKAGE_IDENT_REV: 0; MOUSER_DESCRIPTION: TVS Diodes - Transient Voltage Suppressors 400W 70V; MOUSER_PART_NUMBER: 621-SMAT70A-13-F; MPN: SMAT70A-13-F; NUMBER_OF_CHANNELS: 1; PACKAGE: SMA; PEAK_PULSE_CURRENT: 3.5A; PREFIX: D; REVERSE_STANDOFF_VOLTAGE: 70V; ROHS: yes; STANDOFF_HEIGHT: 0.05mm; TEMPERATURE_RANGE_HIGH: +150°C; TEMPERATURE_RANGE_LOW: -55°C; VERIFICATION_VERSION: 0.0.0.1
P1:IC1 P1:IC2 = msrm; DIGIKEY: RP115H331B-T1-FE-ND; VOLTAGE: 3.3V
P1:IC3 = msrm; DIGIKEY: AP2204K-5.0TRG1DICT-ND
P1:IC4 = XC6701AF02MR-G; DESCRIPTION: LDO Voltage Regulators 28V High Speed Voltage Regulator; HEIGHT: 1.3mm; MANUFACTURER_NAME: Torex; MANUFACTURER_PART_NUMBER: XC6701AF02MR-G; MOUSER_PART_NUMBER: 865-XC6701AF02MR-G; MOUSER_PRICE-STOCK: https://www.mouser.co.uk/ProductDetail/Torex-Semiconductor/XC6701AF02MR-G?qs=AsjdqWjXhJ%252B8LlIUcKkGEA%3D%3D
P1:Q1 = Infineon - IRF640NPBF; CENTROID_NOT_SPECIFIED: No; CONTINUOUS_DRAIN_CURRENT: 18A; DATASHEET: https://www.infineon.com/dgdl/irf640npbf.pdf?fileId=5546d462533600a4015355e7be9019ee; DEVICE_CLASS_L1: Discrete Semiconductors; DEVICE_CLASS_L2: Transistors; DEVICE_CLASS_L3: MOSFETs; DIGIKEY_DESCRIPTION: TRANS MOSFET N-CH 200V 18A TO-220AB; DIGIKEY_PART_NUMBER: IRF640NPBF-ND; DRAIN_TO_SOURCE_BREAKDOWN_VOLTAGE: 200V; DRAIN_TO_SOURCE_RESISTANCE: 0.15Ω; DRAIN_TO_SOURCE_VOLTAGE: 200V; FOOTPRINT_PARAMETERS_0: {"fp_type":"TO220","params":{"N":{"long name":"Number of leads","type":"fixed","short name":"N","value":3},"A":{"nom":false,"long name":"Total height","min":13970000,"max":14220000,"short name":"A","type":"measurement"},"A1":{"nom":false,"long name":"Package clearance","min":3370000,"max":3670000,"short name":"A1","type":"measurement"},"D":{"nom":false,"long name":"Package length","min":false,"max":10750000,"short name":"D","type":"measurement"},"E":{"nom":false,"long name":"Package width","min":false,"max":4830000,"short name":"E","type":"measurement"},"B":{"nom":false,"long name":"Lead width","min":610000,"max":940000,"short name":"B","type":"measurement"},"C":{"nom":false,"long name":"Lead thickness","min":330000,"max":630000,"short name":"C","type":"measurement"},"e":{"nom":2540000,"long name":"Lead pitch","min":null,"max":null,"short name":"e","type":"measurement"},"offset x":{"nom":0,"long name":"X Center offset","min":null,"max":null,"short name":"offset x","type":"measurement"},"offset y":{"nom":0,"long name":"Y Center offset","min":null,"max":null,"short name":"offset y","type":"measurement"},"LS":{"default":"Circle","long name":"Land shape","type":"multichoice","short name":"LS"},"LS1":{"default":"Square","long name":"Land shape (Pin 1)","type":"multichoice","short name":"LS1"}}}; FOOTPRINT_URL: https://www.infineon.com/dgdl/po-to220ab-fp.pdf?fileId=5546d462580663ef0158068cfbee01be; GATE_TO_SOURCE_VOLTAGE: 20V; HEIGHT: 19.8mm; INPUT_CAPACITACE_AT_VDS: 1160pF @ 25V; IPC_LAND_PATTERN_NAME: TO-220; LEAD_FREE: yes; MAX_JUNCTION_TEMP: +175°C; MF: Infineon; MFG_PACKAGE_IDENT: PG-TO220-3; MFG_PACKAGE_IDENT_DATE: 0; MFG_PACKAGE_IDENT_REV: 904; MOUSER_PART_NUMBER: 942-IRF640NPBF; MPN: IRF640NPBF; NUMBER_OF_CHANNELS: 1; NUMBER_OF_N_CHANNELS: 1; PACKAGE: TO220; POWER_DISSIPATION: 150W; PREFIX: Q; ROHS: yes; STANDOFF_HEIGHT: 3.37mm; TECHNOLOGY: MOSFET; TEMPERATURE_RANGE_HIGH: +175°C; TEMPERATURE_RANGE_LOW: -55°C; THRESHOLD_VGS: 2V; TURN_OFF_DELAY_TIME: 23ns; TURN_ON_DELAY_TIME: 10ns; VERIFICATION_VERSION: 0.0.0.1
P1:R4 = Vishay - CRCW12181K00FKEK; AUTOMOTIVE: Yes; AUTOMOTIVE_GRADE: Grade 0; CENTROID_NOT_SPECIFIED: No; COMPOSITION: Thick Film; DATASHEET: http://www.vishay.com/docs/20035/dcrcwe3.pdf; DEVICE_CLASS_L1: Passive Components; DEVICE_CLASS_L2: Resistors; DEVICE_CLASS_L3: Chip SMD Resistors; FOOTPRINT_PARAMETERS_1: {"fp_type":"chip_res","params":{"L":{"nom":3200000,"long name":"Length","min":3000000,"max":3300000,"short name":"L","type":"measurement"},"W":{"nom":4600000,"long name":"Width","min":4450000,"max":4750000,"short name":"W","type":"measurement"},"t":{"nom":550000,"long name":"Height","min":500000,"max":600000,"short name":"t","type":"measurement"},"b":{"nom":450000,"long name":"Terminal width","min":250000,"max":650000,"short name":"b","type":"measurement"},"P":{"default":"false","long name":"Polarized","type":"multichoice","short name":"P"},"offset x":{"nom":0,"long name":"X Center offset","min":null,"max":null,"short name":"offset x","type":"measurement"},"offset y":{"nom":0,"long name":"Y Center offset","min":null,"max":null,"short name":"offset y","type":"measurement"},"LS":{"long name":"Land shape","type":"fixed","short name":"LS","value":"Rectangle"},"solder toe":{"nom":550000,"long name":"Solder fillet (toe)","min":null,"max":null,"short name":"solder toe","type":"fixedmeasurement"},"solder heel":{"nom":0,"long name":"Solder fillet (heel)","min":null,"max":null,"short name":"solder heel","type":"fixedmeasurement"},"solder side":{"nom":50000,"long name":"Solder fillet (side)","min":null,"max":null,"short name":"solder side","type":"fixedmeasurement"},"courtyard":{"nom":500000,"long name":"Courtyard","min":null,"max":null,"short name":"courtyard","type":"fixedmeasurement"},"SF":{"default":"A (>= 1608 metric)","long name":"Packing level","type":"multichoiceparent","short name":"SF","help":"http://support.upverter.com/customer/portal/articles/978783-what-is-a-footprint-packing-level","children":["solder toe","solder heel","solder side","courtyard"]}}}; FOOTPRINT_PARAMETERS_2: {"fp_type":"chip_res","params":{"L":{"nom":3200000,"long name":"Length","min":3000000,"max":3300000,"short name":"L","type":"measurement"},"W":{"nom":4600000,"long name":"Width","min":4450000,"max":4750000,"short name":"W","type":"measurement"},"t":{"nom":550000,"long name":"Height","min":500000,"max":600000,"short name":"t","type":"measurement"},"b":{"nom":450000,"long name":"Terminal width","min":250000,"max":650000,"short name":"b","type":"measurement"},"P":{"default":"false","long name":"Polarized","type":"multichoice","short name":"P"},"offset x":{"nom":0,"long name":"X Center offset","min":null,"max":null,"short name":"offset x","type":"measurement"},"offset y":{"nom":0,"long name":"Y Center offset","min":null,"max":null,"short name":"offset y","type":"measurement"},"LS":{"long name":"Land shape","type":"fixed","short name":"LS","value":"Rectangle"},"solder toe":{"nom":350000,"long name":"Solder fillet (toe)","min":null,"max":null,"short name":"solder toe","type":"fixedmeasurement"},"solder heel":{"nom":0,"long name":"Solder fillet (heel)","min":null,"max":null,"short name":"solder heel","type":"fixedmeasurement"},"solder side":{"nom":0,"long name":"Solder fillet (side)","min":null,"max":null,"short name":"solder side","type":"fixedmeasurement"},"courtyard":{"nom":250000,"long name":"Courtyard","min":null,"max":null,"short name":"courtyard","type":"fixedmeasurement"},"SF":{"default":"B (>= 1608 metric)","long name":"Packing level","type":"multichoiceparent","short name":"SF","help":"http://support.upverter.com/customer/portal/articles/978783-what-is-a-footprint-packing-level","children":["solder toe","solder heel","solder side","courtyard"]}}}; FOOTPRINT_PARAMETERS_3: {"fp_type":"chip_res","params":{"L":{"nom":3200000,"long name":"Length","min":3000000,"max":3300000,"short name":"L","type":"measurement"},"W":{"nom":4600000,"long name":"Width","min":4450000,"max":4750000,"short name":"W","type":"measurement"},"t":{"nom":550000,"long name":"Height","min":500000,"max":600000,"short name":"t","type":"measurement"},"b":{"nom":450000,"long name":"Terminal width","min":250000,"max":650000,"short name":"b","type":"measurement"},"P":{"default":"false","long name":"Polarized","type":"multichoice","short name":"P"},"offset x":{"nom":0,"long name":"X Center offset","min":null,"max":null,"short name":"offset x","type":"measurement"},"offset y":{"nom":0,"long name":"Y Center offset","min":null,"max":null,"short name":"offset y","type":"measurement"},"LS":{"long name":"Land shape","type":"fixed","short name":"LS","value":"Rectangle"},"solder toe":{"nom":150000,"long name":"Solder fillet (toe)","min":null,"max":null,"short name":"solder toe","type":"fixedmeasurement"},"solder heel":{"nom":0,"long name":"Solder fillet (heel)","min":null,"max":null,"short name":"solder heel","type":"fixedmeasurement"},"solder side":{"nom":-50000,"long name":"Solder fillet (side)","min":null,"max":null,"short name":"solder side","type":"fixedmeasurement"},"courtyard":{"nom":100000,"long name":"Courtyard","min":null,"max":null,"short name":"courtyard","type":"fixedmeasurement"},"SF":{"default":"C (>= 1608 metric)","long name":"Packing level","type":"multichoiceparent","short name":"SF","help":"http://support.upverter.com/customer/portal/articles/978783-what-is-a-footprint-packing-level","children":["solder toe","solder heel","solder side","courtyard"]}}}; FOOTPRINT_VARIANT_NAME_0: Recommended_Land_Pattern; FOOTPRINT_VARIANT_NAME_1: IPC_A; FOOTPRINT_VARIANT_NAME_2: IPC_B; FOOTPRINT_VARIANT_NAME_3: IPC_C; HEIGHT: 0.6mm; IPC_LAND_PATTERN_NAME: RESC320460X55; LEAD_FREE: Yes; MF: Vishay; MFG_PACKAGE_IDENT: CRCW1218-e3; MFG_PACKAGE_IDENT_COMPONENT_ID: 456d41f10116fe40; MFG_PACKAGE_IDENT_DATE: 0; MFG_PACKAGE_IDENT_REV: 0; MPN: CRCW12181K00FKEK; PACKAGE: 1218; POWER_RATING: 1W; PREFIX: R; RESISTANCE: 1kΩ; ROHS: Yes; SERIES: CRCW e230; TEMPERATURE_COEFFICIENT: 100ppm/°C; TEMPERATURE_RANGE_HIGH: +155°C; TEMPERATURE_RANGE_LOW: -55°C; TOLERANCE: 1%; VERIFICATION_VERSION: 0.0.0.3; VOLTAGE_RATING: 200V
P1:U1 = Linear Technology - LT4356HS-3#PBF; ACTIVE_LIMITING: yes; CIIVA_IDS: 280457; CIRCUIT_BREAKERS: 1; CIRCUIT_BREAKER_ACCURACY: 10; CIRCUIT_BREAKER_THRESHOLD: 50 mV; COMPONENT_LINK_1_DESCRIPTION: Manufacturer URL; COMPONENT_LINK_1_URL: http://www.linear.com/; COMPONENT_LINK_3_DESCRIPTION: Package Specification; COMPONENT_LINK_3_URL: http://cds.linear.com/docs/en/packaging/S16%2005-08-1610%20Rev%20G.pdf; DATASHEET: http://cds.linear.com/docs/en/datasheet/43563fb.pdf; DATASHEET_VERSION: Rev. B; EXTENDED_TEMP: C, I, H, MP; FAST_COMPARATOR: no; FAULT: no; FOLDBACK: yes; FOOTPRINT_VARIANT_NAME_0: Level C; FOOTPRINT_VARIANT_NAME_1: Level B; FOOTPRINT_VARIANT_NAME_2: Level A; IMPORTED: yes; IMPORTED_FROM: vault; IMPORT_TS: 1521846764; IN_RUSH_CURRENT: Ramp; MF: Linear Technology; MOUNTING_TECHNOLOGY: Surface Mount; MPN: LT4356HS-3#PBF; PACKAGE: S-16; PACKAGE_DESCRIPTION: 16-Pin Plastic Small Outline, Body 9.9 x 3.9 mm, Pitch 1.27 mm; PACKAGE_VERSION: Rev. G, 05/2012; POWER_GOOD: no; PREFIX: U; RELEASE_DATE: 1377783357; RESET: no; ROHS: Yes; VAULT_GUID: AF2ADA32-0417-48BB-B611-3DAE758AA892; VAULT_REVISION: 7C1DD302-AD26-4490-B5F0-A8D2873D3302; VIN_RANGE: 4 to 80 V
P1:U4 = RECOM - R-78E5.0-1.0; CENTROID_NOT_SPECIFIED: No; DATASHEET: https://www.recom-power.com/pdf/Innoline/R-78Exx-1.0.pdf; DEVICE_CLASS_L1: Integrated Circuits (ICs); DEVICE_CLASS_L2: Power Management ICs; DEVICE_CLASS_L3: Voltage Regulators - Switching; DIGIKEY_DESCRIPTION: IC DC DC CONVERTER 5V 5W; DIGIKEY_PART_NUMBER: 945-2201-ND; HEIGHT: 10.9mm; LEAD_FREE: yes; MAX_POWER_DISSIPATION: 5W; MAX_SUPPLY_VOLTAGE: 28V; MF: RECOM; MFG_PACKAGE_IDENT: R-78E5.0-1.0; MFG_PACKAGE_IDENT_DATE: 0; MFG_PACKAGE_IDENT_REV: 0; MIN_SUPPLY_VOLTAGE: 8V; MOUSER_DESCRIPTION: 1A DC/DC-Converter 'INNOLINE' SIP3 reg; V. In: 8-28; V. Out: 5.0; mA. Out: 1000; MOUSER_PART_NUMBER: 919-R-78E5.0-1.0; MPN: R-78E5.0-1.0; NOMINAL_SUPPLY_CURRENT: 1.5mA; NUMBER_OF_OUTPUTS: 1; OUTPUT_CURRENT: 1A; OUTPUT_VOLTAGE: 5V; PACKAGE: SIP3; PREFIX: U; ROHS: yes; STANDOFF_HEIGHT: 0.26mm; SWITCHING_FREQUENCY: 330kHz; SWITCHING_TOPOLOGY: Buck; TEMPERATURE_RANGE_HIGH: +85°C; TEMPERATURE_RANGE_LOW: -40°C; VERIFICATION_VERSION: 0.0.0.1
R3 R4 = msrm; DIGIKEY: YAG2307CT-ND; RVALUE: 100k; SPICEPREFIX: R
U$1 = msrm; DIGIKEY: 277-17182-ND
X1 = msrm; DIGIKEY: 455-1649-ND
X2 = msrm; DIGIKEY: WM7652CT-ND
Y2 = msrm; DIGIKEY: XC3046CT-ND; ESR: 130 Ohm; F: 12MHz; F_TOLERANCE: ±10ppm; L_CAPACITANCE: 10pF

## Nets
3V3_CURRENT: MOTOR_DRIVER1:U6.12 MOTOR_DRIVER1:U7.12 P1:C5.1 P1:IC2.1 P1:IC2.5
3V3_MICRO: C3.1 C15.1 C16.1 C19.1 C23.1 H1.1 IC2.17 IC2.36 IC2.44 L5.1 P1:C3.1 P1:IC1.1 P1:IC1.5
5V_TORQUE: C4.1 IC1.8 J3.1 P1:C7.1 P1:IC3.5 R3.2
+5V: ETHERCAT1:C66.1 ETHERCAT1:L5.1 J1.1 P1:C1.1 P1:C4.1 P1:C6.1 P1:IC1.3 P1:IC1.4 P1:IC2.3 P1:IC2.4 P1:IC3.1 P1:IC3.3 P1:U4.3 X2.1
+15V: MOTOR_DRIVER1:C2.1 MOTOR_DRIVER1:C7.1 MOTOR_DRIVER1:C10.1 MOTOR_DRIVER1:R5.1 MOTOR_DRIVER1:R10.1 MOTOR_DRIVER1:R16.1 MOTOR_DRIVER1:U1.2 MOTOR_DRIVER1:U2.2 MOTOR_DRIVER1:U3.2 P1:C9.1 P1:IC4.5
+24V: MOTOR_DRIVER1:C3.1 MOTOR_DRIVER1:C4.1 MOTOR_DRIVER1:C5.1 MOTOR_DRIVER1:C6.2 MOTOR_DRIVER1:C9.2 MOTOR_DRIVER1:C12.2 MOTOR_DRIVER1:U1.18-19-20-21-22-23 MOTOR_DRIVER1:U2.18-19-20-21-22-23 MOTOR_DRIVER1:U3.18-19-20-21-22-23 P1:C8.1 P1:IC4.1 P1:IC4.4 P1:Q1.3 P1:R3.2 P1:U1.4 P1:U4.1
CURRENT_A: IC2.3 MOTOR_DRIVER1:U7.10
CURRENT_B: IC2.7 MOTOR_DRIVER1:U6.10
ECAT_CS: ETHERCAT1:R19.2 IC2.20
ECAT_DATA2: ETHERCAT1:R21.2 IC2.15
ECAT_DATA3: ETHERCAT1:R20.2 IC2.16
ECAT_MISO: ETHERCAT1:R22.2 IC2.14
ECAT_MOSI: ETHERCAT1:R23.2 IC2.13
ECAT_SCK: ETHERCAT1:R18.2 IC2.19
ENA: IC2.27 MOTOR_DRIVER1:U1.5
ENB: IC2.25 MOTOR_DRIVER1:U2.5
ENC: IC2.26 MOTOR_DRIVER1:U3.5
ETHERCAT1:#MISO: ETHERCAT1:R22.1 ETHERCAT1:U1.13
ETHERCAT1:#MOSI: ETHERCAT1:R23.1 ETHERCAT1:U1.17
ETHERCAT1:#SCK: ETHERCAT1:R18.1 ETHERCAT1:U1.19
ETHERCAT1:#SCS#: ETHERCAT1:R19.1 ETHERCAT1:U1.50
ETHERCAT1:#SQI2: ETHERCAT1:R21.1 ETHERCAT1:U1.12
ETHERCAT1:#SQI3: ETHERCAT1:R20.1 ETHERCAT1:U1.35
ETHERCAT1:+3V3 [power]: ETHERCAT1:C10.1 ETHERCAT1:C11.1 ETHERCAT1:C12.1 ETHERCAT1:C13.1 ETHERCAT1:C14.1 ETHERCAT1:C15.1 ETHERCAT1:C22.1 ETHERCAT1:C33.1 ETHERCAT1:D1.2 ETHERCAT1:IC1.8 ETHERCAT1:IC2.1 ETHERCAT1:IC2.5 ETHERCAT1:L1.1 ETHERCAT1:L2.1 ETHERCAT1:L3.1 ETHERCAT1:R4.2 ETHERCAT1:R5.2 ETHERCAT1:R6.2 ETHERCAT1:U1.5 ETHERCAT1:U1.7 ETHERCAT1:U1.14 ETHERCAT1:U1.20 ETHERCAT1:U1.32 ETHERCAT1:U1.37 ETHERCAT1:U1.47
ETHERCAT1:CT1: ETHERCAT1:C31.1 ETHERCAT1:R16.1 ETHERCAT1:T1.3 ETHERCAT1:T1.6
ETHERCAT1:CT2: ETHERCAT1:C32.1 ETHERCAT1:R17.1 ETHERCAT1:T2.3 ETHERCAT1:T2.6
ETHERCAT1:GPIO0: ETHERCAT1:R24.2 ETHERCAT1:R26.1 ETHERCAT1:U1.48
ETHERCAT1:GPIO1: ETHERCAT1:R25.2 ETHERCAT1:R27.1 ETHERCAT1:U1.46
ETHERCAT1:GPIO2: ETHERCAT1:R6.1 ETHERCAT1:R7.2 ETHERCAT1:U1.45
ETHERCAT1:I2C_SCL: ETHERCAT1:IC1.6 ETHERCAT1:R4.1 ETHERCAT1:U1.43
ETHERCAT1:I2C_SDA: ETHERCAT1:IC1.5 ETHERCAT1:R5.1 ETHERCAT1:U1.42
ETHERCAT1:IN_RX_N: ETHERCAT1:T1.9 ETHERCAT1:X1.4
ETHERCAT1:IN_RX_P: ETHERCAT1:T1.10 ETHERCAT1:X1.3
ETHERCAT1:IN_TX_N: ETHERCAT1:T1.15 ETHERCAT1:X1.2
ETHERCAT1:IN_TX_P: ETHERCAT1:T1.16 ETHERCAT1:X1.1
ETHERCAT1:IRQ: ETHERCAT1:U1.44
ETHERCAT1:N$1: ETHERCAT1:D2.2 ETHERCAT1:R26.2
ETHERCAT1:N$2: ETHERCAT1:D3.2 ETHERCAT1:R27.2
ETHERCAT1:N$3: ETHERCAT1:IC2.3 ETHERCAT1:IC2.4 ETHERCAT1:L5.2
ETHERCAT1:N$15: ETHERCAT1:D1.1 ETHERCAT1:R7.1
ETHERCAT1:OSCI: ETHERCAT1:R1.2 ETHERCAT1:U1.1
ETHERCAT1:OSCI1: ETHERCAT1:C20.2 ETHERCAT1:R1.1 ETHERCAT1:Y1.3
ETHERCAT1:OSCO: ETHERCAT1:C21.2 ETHERCAT1:U1.2 ETHERCAT1:Y1.1
ETHERCAT1:OSCVDD12: ETHERCAT1:U1.3
ETHERCAT1:OUT_RX_N: ETHERCAT1:T2.9 ETHERCAT1:X3.5
ETHERCAT1:OUT_RX_P: ETHERCAT1:T2.10 ETHERCAT1:X3.4
ETHERCAT1:OUT_TX_N: ETHERCAT1:T2.15 ETHERCAT1:X3.3
ETHERCAT1:OUT_TX_P: ETHERCAT1:T2.16 ETHERCAT1:X3.2
ETHERCAT1:RBIAS: ETHERCAT1:R2.2 ETHERCAT1:U1.57
ETHERCAT1:RST#: ETHERCAT1:U1.11
ETHERCAT1:RXA_N: ETHERCAT1:C24.1 ETHERCAT1:R10.1 ETHERCAT1:T1.8 ETHERCAT1:U1.54
ETHERCAT1:RXA_P: ETHERCAT1:C23.1 ETHERCAT1:R11.1 ETHERCAT1:T1.7 ETHERCAT1:U1.55
ETHERCAT1:RXB_N: ETHERCAT1:C28.1 ETHERCAT1:R14.1 ETHERCAT1:T2.2 ETHERCAT1:U1.61
ETHERCAT1:RXB_P: ETHERCAT1:C27.1 ETHERCAT1:R15.1 ETHERCAT1:T2.1 ETHERCAT1:U1.60
ETHERCAT1:TXA_N: ETHERCAT1:C26.1 ETHERCAT1:R8.1 ETHERCAT1:T1.2 ETHERCAT1:U1.52
ETHERCAT1:TXA_P: ETHERCAT1:C25.1 ETHERCAT1:R9.1 ETHERCAT1:T1.1 ETHERCAT1:U1.53
ETHERCAT1:TXB_N: ETHERCAT1:C30.1 ETHERCAT1:R12.1 ETHERCAT1:T2.8 ETHERCAT1:U1.63
ETHERCAT1:TXB_P: ETHERCAT1:C29.1 ETHERCAT1:R13.1 ETHERCAT1:T2.7 ETHERCAT1:U1.62
ETHERCAT1:VDD [power]: ETHERCAT1:C16.1 ETHERCAT1:C17.1 ETHERCAT1:C18.1 ETHERCAT1:C19.1 ETHERCAT1:L4.1 ETHERCAT1:U1.6 ETHERCAT1:U1.24 ETHERCAT1:U1.38
ETHERCAT1:VDD12TX [power]: ETHERCAT1:C6.1 ETHERCAT1:C7.1 ETHERCAT1:C8.1 ETHERCAT1:C9.1 ETHERCAT1:L4.2 ETHERCAT1:U1.56 ETHERCAT1:U1.59
ETHERCAT1:VDD33BIAS [power]: ETHERCAT1:C5.1 ETHERCAT1:L3.2 ETHERCAT1:U1.58
ETHERCAT1:VDD33TXRX1 [power]: ETHERCAT1:C1.1 ETHERCAT1:C2.1 ETHERCAT1:L1.2 ETHERCAT1:R8.2 ETHERCAT1:R9.2 ETHERCAT1:R10.2 ETHERCAT1:R11.2 ETHERCAT1:R16.2 ETHERCAT1:U1.51
ETHERCAT1:VDD33TXRX2 [power]: ETHERCAT1:C3.1 ETHERCAT1:C4.1 ETHERCAT1:L2.2 ETHERCAT1:R12.2 ETHERCAT1:R13.2 ETHERCAT1:R14.2 ETHERCAT1:R15.2 ETHERCAT1:R17.2 ETHERCAT1:U1.64
GND: C3.2 C4.2 C6.1 C7.1 C14.2 C15.2 C16.2 C19.2 C20.2 C21.2 C22.2 C23.2 ETHERCAT1:C1.2 ETHERCAT1:C2.2 ETHERCAT1:C3.2 ETHERCAT1:C4.2 ETHERCAT1:C5.2 ETHERCAT1:C6.2 ETHERCAT1:C7.2 ETHERCAT1:C8.2 ETHERCAT1:C9.2 ETHERCAT1:C10.2 ETHERCAT1:C11.2 ETHERCAT1:C12.2 ETHERCAT1:C13.2 ETHERCAT1:C14.2 ETHERCAT1:C15.2 ETHERCAT1:C16.2 ETHERCAT1:C17.2 ETHERCAT1:C18.2 ETHERCAT1:C19.2 ETHERCAT1:C20.1 ETHERCAT1:C21.1 ETHERCAT1:C22.2 ETHERCAT1:C23.2 ETHERCAT1:C24.2 ETHERCAT1:C25.2 ETHERCAT1:C26.2 ETHERCAT1:C27.2 ETHERCAT1:C28.2 ETHERCAT1:C29.2 ETHERCAT1:C30.2 ETHERCAT1:C31.2 ETHERCAT1:C32.2 ETHERCAT1:C33.2 ETHERCAT1:C66.2 ETHERCAT1:D2.1 ETHERCAT1:D3.1 ETHERCAT1:IC1.1 ETHERCAT1:IC1.2 ETHERCAT1:IC1.3 ETHERCAT1:IC1.4 ETHERCAT1:IC1.7 ETHERCAT1:IC1.9 ETHERCAT1:IC2.2 ETHERCAT1:R2.1 ETHERCAT1:R24.1 ETHERCAT1:R25.1 ETHERCAT1:U1.4 ETHERCAT1:U1.8 ETHERCAT1:U1.9 ETHERCAT1:U1.10 ETHERCAT1:U1.41 ETHERCAT1:U1.65 ETHERCAT1:Y1.2 ETHERCAT1:Y1.4 H1.3 H1.5 IC1.4 IC1.5 IC2.5 IC2.18 IC2.35 IC2.42 J1.2 J3.2 M1.2 MOTOR_DRIVER1:C2.2 MOTOR_DRIVER1:C3.2 MOTOR_DRIVER1:C4.2 MOTOR_DRIVER1:C5.2 MOTOR_DRIVER1:C6.1 MOTOR_DRIVER1:C7.2 MOTOR_DRIVER1:C9.1 MOTOR_DRIVER1:C10.2 MOTOR_DRIVER1:C12.1 MOTOR_DRIVER1:U1.3 MOTOR_DRIVER1:U1.6 MOTOR_DRIVER1:U1.8 MOTOR_DRIVER1:U1.11-12-13-14-15 MOTOR_DRIVER1:U2.3 MOTOR_DRIVER1:U2.6 MOTOR_DRIVER1:U2.8 MOTOR_DRIVER1:U2.11-12-13-14-15 MOTOR_DRIVER1:U3.3 MOTOR_DRIVER1:U3.6 MOTOR_DRIVER1:U3.8 MOTOR_DRIVER1:U3.11-12-13-14-15 MOTOR_DRIVER1:U6.5 MOTOR_DRIVER1:U7.5 P1:C1.2 P1:C2.2 P1:C3.2 P1:C4.2 P1:C5.2 P1:C6.2 P1:C7.2 P1:C8.2 P1:C9.2 P1:D1.2 P1:IC1.2 P1:IC2.2 P1:IC3.2 P1:IC4.2 P1:R2.1 P1:U1.12 P1:U4.2 R1.2 R4.2 X2.2 Y2.2 Y2.4
HALL_A: IC2.33 J1.5
HALL_B: IC2.32 J1.4
HALL_C: IC2.37 J1.3
INA: IC2.28 MOTOR_DRIVER1:U1.4
INB: IC2.30 MOTOR_DRIVER1:U2.4
INC: IC2.31 MOTOR_DRIVER1:U3.4
MOTOR_DRIVER1:N$1 [analog]: MOTOR_DRIVER1:R1.2 MOTOR_DRIVER1:R2.2 MOTOR_DRIVER1:U1.24
MOTOR_DRIVER1:N$2 [analog]: MOTOR_DRIVER1:D10.2 MOTOR_DRIVER1:R1.1
MOTOR_DRIVER1:N$3 [analog]: MOTOR_DRIVER1:D10.1 MOTOR_DRIVER1:R2.1 MOTOR_DRIVER1:U1.25
MOTOR_DRIVER1:N$4 [analog]: MOTOR_DRIVER1:R6.2 MOTOR_DRIVER1:R7.2 MOTOR_DRIVER1:U2.24
MOTOR_DRIVER1:N$5 [analog]: MOTOR_DRIVER1:R3.2 MOTOR_DRIVER1:R4.2 MOTOR_DRIVER1:U1.9
MOTOR_DRIVER1:N$6 [analog]: MOTOR_DRIVER1:D11.2 MOTOR_DRIVER1:R4.1
MOTOR_DRIVER1:N$7 [analog]: MOTOR_DRIVER1:D11.1 MOTOR_DRIVER1:R3.1 MOTOR_DRIVER1:U1.7
MOTOR_DRIVER1:N$8 [analog]: MOTOR_DRIVER1:C1.2 MOTOR_DRIVER1:U1.26 MOTOR_DRIVER1:U1.27
MOTOR_DRIVER1:N$9 [analog]: MOTOR_DRIVER1:C1.1 MOTOR_DRIVER1:D3.C MOTOR_DRIVER1:U1.1
MOTOR_DRIVER1:N$10 [analog]: MOTOR_DRIVER1:D3.A MOTOR_DRIVER1:R5.2
MOTOR_DRIVER1:N$12 [analog]: MOTOR_DRIVER1:D1.2 MOTOR_DRIVER1:R6.1
MOTOR_DRIVER1:N$13 [analog]: MOTOR_DRIVER1:D1.1 MOTOR_DRIVER1:R7.1 MOTOR_DRIVER1:U2.25
MOTOR_DRIVER1:N$14 [analog]: MOTOR_DRIVER1:R8.2 MOTOR_DRIVER1:R9.2 MOTOR_DRIVER1:U2.9
MOTOR_DRIVER1:N$15 [analog]: MOTOR_DRIVER1:D4.2 MOTOR_DRIVER1:R9.1
MOTOR_DRIVER1:N$16 [analog]: MOTOR_DRIVER1:D4.1 MOTOR_DRIVER1:R8.1 MOTOR_DRIVER1:U2.7
MOTOR_DRIVER1:N$17 [analog]: MOTOR_DRIVER1:C8.2 MOTOR_DRIVER1:U2.26 MOTOR_DRIVER1:U2.27
MOTOR_DRIVER1:N$18 [analog]: MOTOR_DRIVER1:C8.1 MOTOR_DRIVER1:D6.C MOTOR_DRIVER1:U2.1
MOTOR_DRIVER1:N$19 [analog]: MOTOR_DRIVER1:D6.A MOTOR_DRIVER1:R10.2
MOTOR_DRIVER1:N$21 [analog]: MOTOR_DRIVER1:R12.2 MOTOR_DRIVER1:R13.2 MOTOR_DRIVER1:U3.24
MOTOR_DRIVER1:N$22 [analog]: MOTOR_DRIVER1:D2.2 MOTOR_DRIVER1:R12.1
MOTOR_DRIVER1:N$23 [analog]: MOTOR_DRIVER1:D2.1 MOTOR_DRIVER1:R13.1 MOTOR_DRIVER1:U3.25
MOTOR_DRIVER1:N$24: MOTOR_DRIVER1:R14.2 MOTOR_DRIVER1:R15.2 MOTOR_DRIVER1:U3.9
MOTOR_DRIVER1:N$25 [analog]: MOTOR_DRIVER1:D5.2 MOTOR_DRIVER1:R15.1
MOTOR_DRIVER1:N$26 [analog]: MOTOR_DRIVER1:D5.1 MOTOR_DRIVER1:R14.1 MOTOR_DRIVER1:U3.7
MOTOR_DRIVER1:N$27 [analog]: MOTOR_DRIVER1:C11.2 MOTOR_DRIVER1:U3.26 MOTOR_DRIVER1:U3.27
MOTOR_DRIVER1:N$28 [analog]: MOTOR_DRIVER1:C11.1 MOTOR_DRIVER1:D9.C MOTOR_DRIVER1:U3.1
MOTOR_DRIVER1:N$29 [analog]: MOTOR_DRIVER1:D9.A MOTOR_DRIVER1:R16.2
MOTOR_DRIVER1:U1 [analog]: MOTOR_DRIVER1:U1.10 MOTOR_DRIVER1:U1.16-17 MOTOR_DRIVER1:U6.1-2
MOTOR_DRIVER1:V1 [analog]: MOTOR_DRIVER1:U2.10 MOTOR_DRIVER1:U2.16-17 MOTOR_DRIVER1:U7.1-2
N$1: C5.2 IC1.6 R1.1 R2.2
N$2: IC1.1 R3.1 R4.1
NRESET: H1.10 IC2.40
P1:FB_LT4356 [analog]: P1:R2.2 P1:R3.1 P1:U1.2
P1:N$1: P1:R1.1 P1:U1.5
P1:N$2: P1:Q1.1 P1:R1.2
P1:N$5: P1:C2.1 P1:U1.1
P1:VCC/SNS_LT4356 [analog]: P1:D1.1 P1:R4.1 P1:U1.7 P1:U1.8
POS_MISO: IC2.11 X2.7
POS_MOSI: IC2.9 X2.8
POS_NCS: X2.6
POS_SCK: IC2.10 X2.5
SWCLK: H1.4 IC2.45
SWDIO: H1.2 IC2.46
TORQUE_SENS: C5.1 IC1.7 IC2.4 R2.1
U: MOTOR_DRIVER1:U6.3-4 X1.3
UD+: IC1.3 J3.4
UD-: IC1.2 J3.3
V: MOTOR_DRIVER1:U7.3-4 X1.2
VDDANA: C14.1 C20.1 IC2.6 L5.2
VDDCORE: C21.1 C22.1 IC2.41
VIN: M1.1 P1:Q1.2 P1:R4.2
W: MOTOR_DRIVER1:U3.10 MOTOR_DRIVER1:U3.16-17 X1.1
XIN: C7.2 IC2.23 Y2.1
XOUT: C6.2 IC2.24 Y2.3